# Altium PCB PCB.PcbDoc (part 1 of 2)
Units mil, origin at the board's own origin, x right, y up, seen from the top; angles counter-clockwise.
Board outline 3920 x 1470 mil, 2 copper layers (Top Layer, Bottom Layer), stack 60.433 mil thick; 97 components, 79 nets, 353 pads, 358 vias.
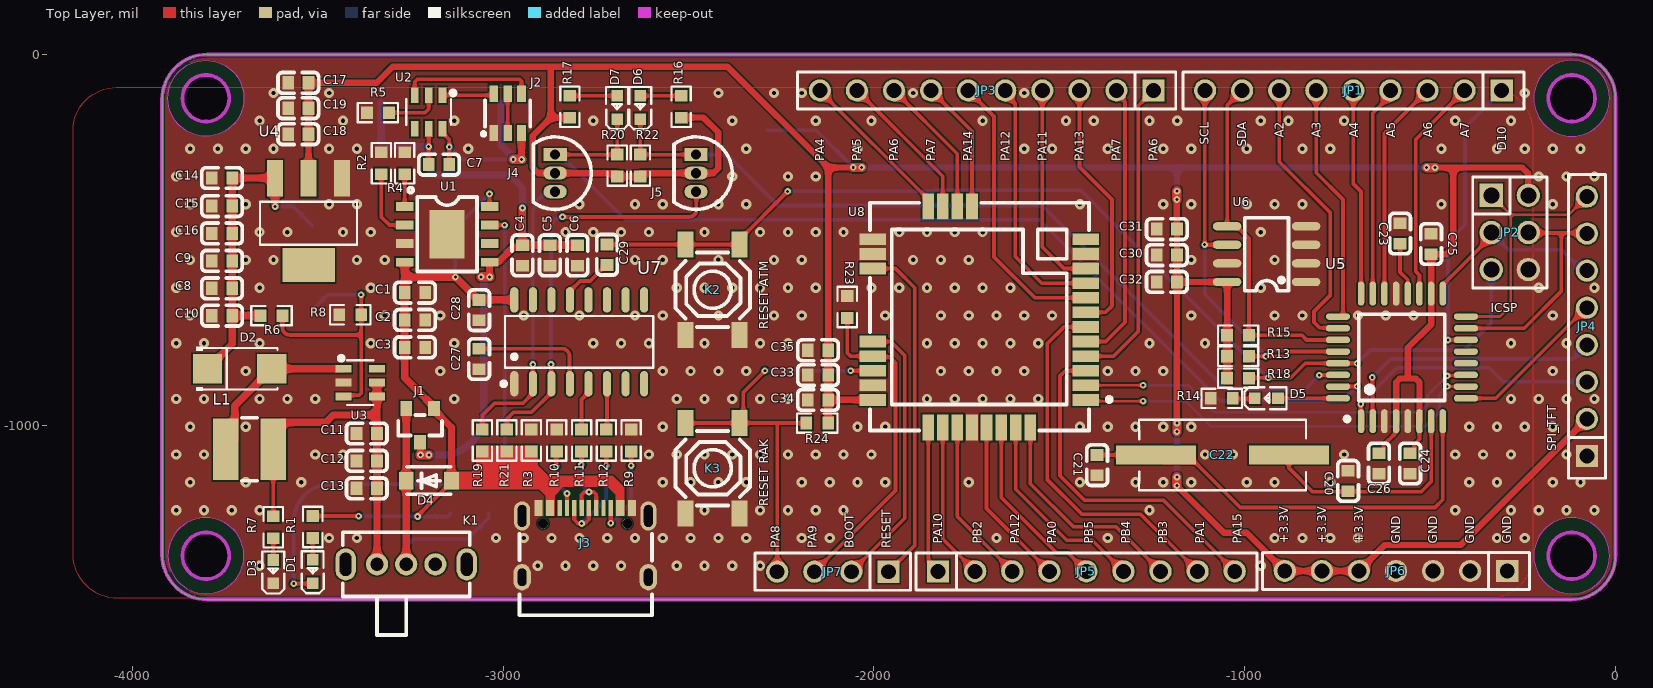
[diagram p0: Top Layer view]
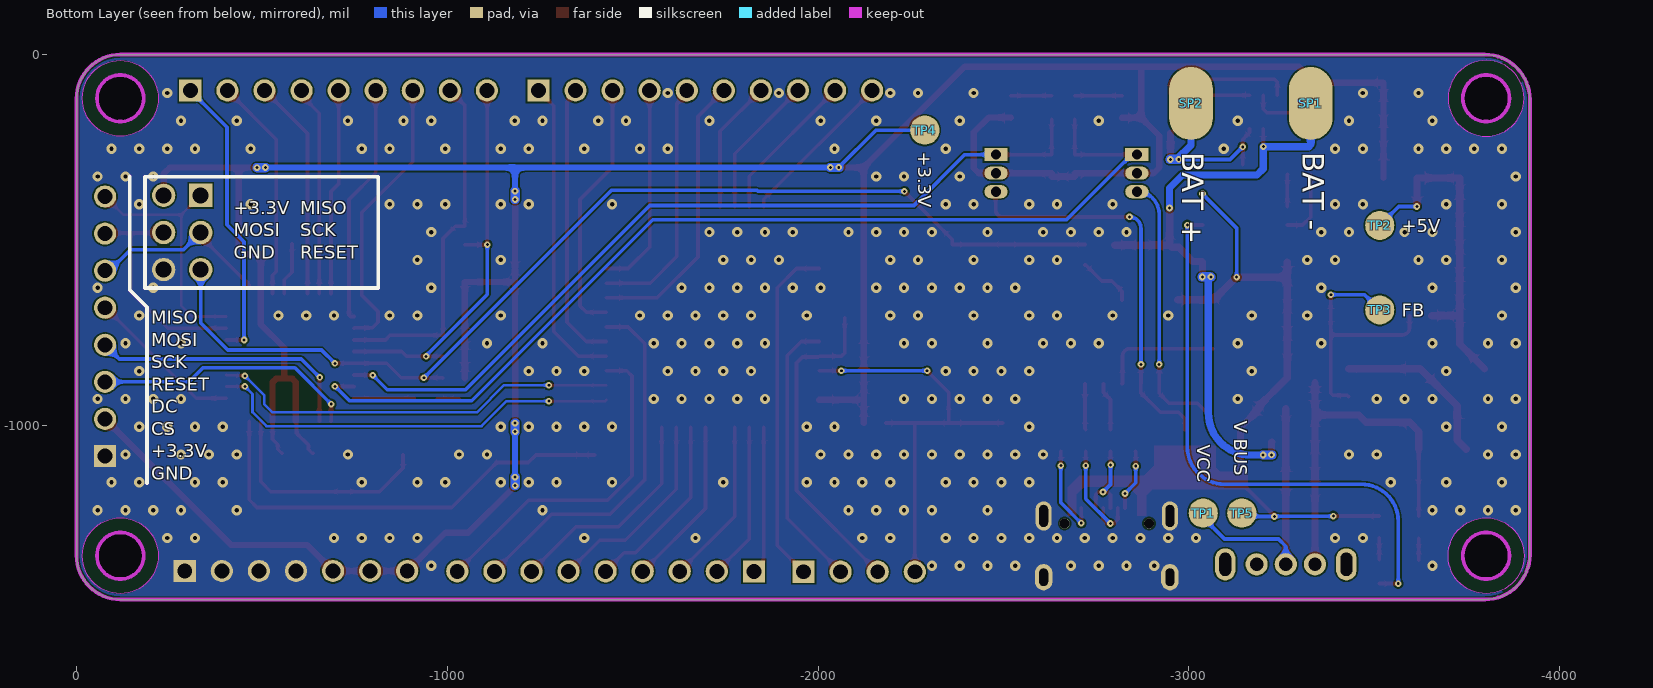
[diagram p1: Bottom Layer view, seen from below]
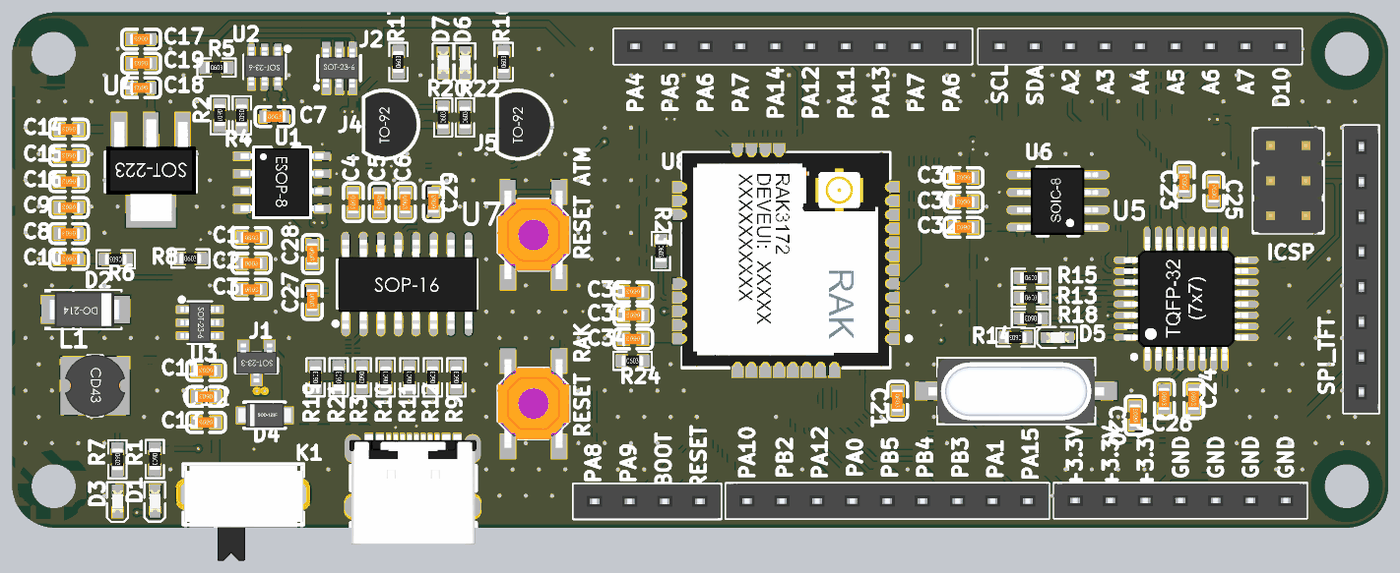
[diagram p3: 3D render of the assembled board from above, using the file's embedded part models]

## Layer stack, top to bottom
Top Solder: solder mask 0.5, Solder Resist, Dk 3.8
Top Layer: signal copper 1.378
Dielectric 1: prepreg 7.874, 7628, Dk 4.6
Core: core 41.929, FR-4, Dk 4.5
Dielectric 2: prepreg 7.874, 7628, Dk 4.6
Bottom Layer: signal copper 1.378
Bottom Solder: solder mask 0.5, Solder Resist, Dk 3.8

## Board outline
-3920,-1348.7 ccw(c-3798.7,-1348.7) -3798.7,-1470 -118.5,-1470 ccw(c-118.5,-1351.5) 0,-1351.5 0,-118.5 ccw(c-118.5,-118.5) -118.5,0 -3798.44,0 ccw(c-3798.44,-121.56) -3920,-121.56
cut-out: -181.1,-118.11 ccw(c-118.11,-118.11) -118.11,-181.1 ccw(c-118.11,-118.11) -55.12,-118.11 ccw(c-118.11,-118.11) -118.11,-55.12 ccw(c-118.11,-118.11)
cut-out: -3801.89,-181.1 cw(c-3801.89,-118.11) -3864.88,-118.11 cw(c-3801.89,-118.11) -3801.89,-55.12 cw(c-3801.89,-118.11) -3738.9,-118.11 cw(c-3801.89,-118.11)
cut-out: -3864.88,-1351.89 ccw(c-3801.89,-1351.89) -3801.89,-1414.88 ccw(c-3801.89,-1351.89) -3738.9,-1351.89 ccw(c-3801.89,-1351.89) -3801.89,-1288.9 ccw(c-3801.89,-1351.89)
cut-out: -181.1,-1351.89 ccw(c-118.11,-1351.89) -118.11,-1414.88 ccw(c-118.11,-1351.89) -55.12,-1351.89 ccw(c-118.11,-1351.89) -118.11,-1288.9 ccw(c-118.11,-1351.89)

## Design rules (kind name [scope] priority, off if disabled: settings)
BoardOutlineClearance [All] p1: gap=7.87 ignorepadtopadclearanceinfootprint=FALSE
Clearance Clearance_1 [InNet('No Net') vs InNet('No Net')] p1: gap=10 ignorepadtopadclearanceinfootprint=FALSE
Clearance [All] p2: gap=4 ignorepadtopadclearanceinfootprint=FALSE except(5: Arc-Via Track-Via SMDPad-Via THPad-Via Via-Via Via-Fill Via-Poly Via-Region)
ComponentClearance [All] p1: gap=4 collisioncheckmode=3 verticalgap=4 showdistances=TRUE
DiffPairsRouting [All] p1: maxlimit=4 minlimit=4 mostfreqgap=4 toplayer_minwidth=4 toplayer_maxwidth=71497.94 toplayer_prefwidth=4 bottomlayer_minwidth=4 bottomlayer_maxwidth=71497.94 bottomlayer_prefwidth=4 maxuncoupledlength=500
Height [All] p1: minheight=0 maxheight=71497.94 prefheight=500
HoleSize [All] p1: absolutevalues=TRUE maxlimit=248.03 minlimit=7.87 maxpercent=80.000 minpercent=20.000
HoleToHoleClearance [All] p1: gap=9.84 allowstackedmicrovias=FALSE
MinimumAnnularRing [All] p1: minimumring=3
MinimumSolderMaskSliver [All] p1: minsoldermaskwidth=0
PlaneClearance [All] p1: clearance=4
PlaneConnect PlaneConnectPowerPads [InPadClass('PowerPads')] p1: planeconnectstyle=Direct reliefexpansion=20 reliefentries=4 reliefconductorwidth=10 reliefairgap=10
PlaneConnect [All] p2: pad.planeconnectstyle=Relief pad.reliefexpansion=11.81 pad.reliefentries=4 pad.reliefconductorwidth=4 pad.reliefairgap=4 via.planeconnectstyle=Direct via.reliefexpansion=11.81 via.reliefentries=4 via.reliefconductorwidth=5 via.reliefairgap=5
PolygonConnect PolygonConnectPowerPads [All vs (InPadClass('PowerPads'))] p1: connectstyle=Direct reliefconductorwidth=10 reliefentries=4 polygonreliefangle="90 Angle" airgapwidth=10
PolygonConnect [All] p2: connectstyle=Direct reliefconductorwidth=4 reliefentries=4 polygonreliefangle="90 Angle" airgapwidth=4
RoutingVias [All] p1: holewidth=7.87 width=17.72 viastyle="Through Hole" minholewidth=7.87 minwidth=17.72 maxholewidth=248.03 maxwidth=257.87
SilkToSilkClearance [All] p1: silktosilkclearance=0
SilkToSolderMaskClearance [IsPad] p1: minsilkscreentomaskgap=4 clearancetoexposedcopper=TRUE
SolderMaskExpansion [All] p1: expansion=2.95 istentingtop=FALSE
Width [All] p1: maxlimit=71497.94 minlimit=4 preferedwidth=4
20 further rules are at their usual default settings.

## Classes and differential pairs
component class "Voltage Source": C1 C2 C3 C4 C5 C6 C7 C8 C9 C10 C11 C12 C13 C14 C15 C16 C17 C18 C19 D1 D2 D3 D4 J1 J2 J3 K1 L1 R1 R2 R3 R4 R5 R6 R7 R8 R9 R10 R11 R12 SP1 SP2 TP1 TP2 TP3 TP4 TP5 U1 U2 U3 U4
component class Peripheral: C27 C28 C29 C30 C31 C32 C33 C34 C35 J4 J5 K3 R19 R20 R21 R22 R23 R24 Reset_U4 U6 U7 U8
component class "Micro Controller": C20 C21 C22 C23 C24 C25 C26 D5 D6 D7 K2 R13 R14 R15 R16 R17 R18 Reset_U4 U5
component class Connector: JP1 JP2 JP3 JP4 JP5 JP6 JP7
differential pair D: +D_P -D_N

## Components (designator, comment, footprint, x,y, rotation, side; value= is the part's Value field where it differs from the comment)
C1 "100nF" C0603 -3238.19,-642.03 r0 top
C2 "10uF" C0603 -3238.19,-715.94 r0 top
C3 "22uF" C0603 -3238.19,-789.85 r0 top
C4 "100nF" C0603 -2948.12,-541.81 r270 top
C5 "10uF" C0603 -2874.21,-541.81 r270 top
C6 "22uF" C0603 -2800.07,-541.81 r270 top
C7 "100nF" C0603 -3173,-297 r0 top
C8 "100nF" C0603 -3758.31,-630.54 r180 top
C9 "10uF" C0603 -3758.31,-556.63 r180 top
C10 "22uF" C0603 -3758.31,-704.46 r180 top
C11 "100nF" C0603 -3367.87,-1022.15 r180 top
C12 "10uF" C0603 -3367.87,-1096.06 r180 top
C13 "22uF" C0603 -3367.87,-1169.97 r180 top
C14 "100nF" C0603 -3758.31,-333.07 r180 top
C15 "10uF" C0603 -3758.31,-408.76 r180 top
C16 "22uF" C0603 -3758.31,-482.67 r180 top
C17 "100nF" C0603 -3552.56,-76.27 r180 top
C18 "10uF" C0603 -3552.56,-214.94 r180 top
C19 "22uF" C0603 -3552.56,-144.94 r180 top
C20 "12pF" C0603 -721,-1150 r90 top
C21 "12pF" C0603 -1398,-1107.56 r270 top
C22 "X49SM16MSD2SC" X49SM16MSD2SC -1060,-1080 r0 top
C23 "100nF" C0603 -581,-483 r90 top
C24 "100nF" C0603 -554,-1103 r270 top
C25 "10uF" C0603 -497.26,-511 r90 top
C26 "22uF" C0603 -638,-1103 r270 top
C27 "100nF" C0603 -3065,-821 r270 top
C28 "100nF" C0603 -3065,-689.47 r270 top
C29 "100nF" C0603 -2720,-540 r90 top
C30 "100nF" C0603 -1210,-541 r180 top
C31 "10uF" C0603 -1210,-471 r180 top
C32 "22uF" C0603 -1210,-613.41 r180 top
C33 "100nF" C0603 -2150.81,-864.55 r180 top
C34 "10uF" C0603 -2151,-931.66 r180 top
C35 "22uF" C0603 -2151,-797.66 r180 top
D1 "RED" LED0603 -3513.54,-1394.46 r90 top
D2 "SS34" SS34 -3711,-847.6 r0 top
D3 "YELLOW" LED0603 -3620,-1395 r90 top
D4 "SOD4007" SOD4007 -3200.55,-1149.37 r0 top
D5 "YELLOW" LED0603 -941.73,-927.37 r0 top
D6 "YELLOW" LED0603 -2630.14,-142.82 r90 top
D7 "YELLOW" LED0603 -2692.55,-142.82 r90 top
J1 "AO3401A" AO3401A -3224.17,-1000 r90 top
J2 "FS8205A" FS8205A -2988,-159 r270 top
J3 "TYPE-C 16PIN 2MD(073)" TYPE_C_FAMALE -2778.78,-1316.37 r0 top
J4 "2N7000" 2N7000 -2860,-320 r270 top
J5 "2N7000" 2N7000 -2480,-320 r270 top
JP1 "JP 1x9 2.54" "JP 1x9 CT" -707,-97 r180 top
JP2 "Header" "JP 2x3 DT" -285,-480 r270 top
JP3 "Header" "JP 1x10 CT" -1245.91,-97.02 r180 top
JP4 "JP 1x8 2.54" "JP 1x8 CT" -77,-1083 r90 top
JP5 "JP 1x9 2.54" "JP 1x9 CT" -1427,-1394 r0 top
JP6 "JP 1x7 2.54" "JP 1x7 CT" -292,-1393 r180 top
JP7 "JP 1x4 2.54" "JP 1x4 CT" -1961,-1395 r180 top
K1 "SK12D07VG4" SK12D07VG4 -3261.58,-1375 r0 top
K2 "TS-1140SP-4x4x1.5-260" 4x4x1.5 -2435,-634.49 r90 top
K3 "TS-1140SP-4x4x1.5-260" 4x4x1.5 -2435,-1116.05 r90 top
L1 "10uH" CD43 -3684,-1065 r270 top
R1 "1kΩ" R0603 -3513.68,-1274.46 r270 top
R2 "2kΩ" R0603 -3328.8,-293.22 r270 top
R3 "10kΩ" R0603 -2924,-1041 r270 top
R4 "1kΩ" R0603 -3265.99,-293.43 r270 top
R5 "1kΩ" R0603 -3338,-157 r0 top
R6 "5k1" R0603 -3625,-704.46 r180 top
R7 "1kΩ" R0603 -3620.14,-1275 r270 top
R8 "680" R0603 -3412.66,-702 r0 top
R9 "5k1Ω" R0603 -2654.87,-1041.22 r90 top
R10 "5k1Ω" R0603 -2855.98,-1041.22 r90 top
R11 "0Ω" R0603 -2788.73,-1041.22 r90 top
R12 "0Ω" R0603 -2721.8,-1041.22 r90 top
R13 "4k7Ω" R0603 -1017.84,-813.78 r0 top
R14 "1kΩ" R0603 -1061.73,-927.24 r180 top
R15 "4k7Ω" R0603 -1017.84,-757.23 r0 top
R16 "1kΩ" R0603 -2520,-141 r90 top
R17 "1kΩ" R0603 -2820,-141 r90 top
R18 "10kΩ" R0603 -1017.84,-872.78 r180 top
R19 "10kΩ" R0603 -3056,-1041 r90 top
R20 "10kΩ" R0603 -2692.41,-299.66 r90 top
R21 "10kΩ" R0603 -2990,-1041 r90 top
R22 "10kΩ" R0603 -2630,-299.66 r90 top
R23 "10kΩ" R0603 -2072,-681 r270 top
R24 "10kΩ" R0603 -2153.1,-994 r0 top
SP1 "BAT+" SP -3329,-132 r0 top
SP2 "BAT-" SP -3006,-132 r180 top
TP1 "TP" TP -3039,-1237 r0 top
TP2 "TP" TP -3515,-461 r0 top
TP3 "TP" TP -3515,-689 r0 top
TP4 "TP" TP -2288,-204 r0 top
TP5 "TP" TP -3143,-1237 r0 top
U1 "TP4056" TP4056 -3151.25,-485 r270 top
U2 "DW01A" DW01A -3201,-155 r180 top
U3 "MT3608" MT3608 -3385.55,-885 r270 top
U4 "LM1117S-3.3" AMS1117-3.3 -3525,-451.07 r90 top
U5 "ATMEGA328-AU" ATMEGA328-AU -576,-817 r0 top
U6 "AT24C02C-SSHM-T" AT24C02C-SSHM-T -941,-538.41 r90 top
U7 "CH340C" CH340C -2795,-775 r0 top
U8 "RAK3172-9-SM-I" RAK3172-9-SM-I -1716,-708 r180 top

## Footprints (in the part's own frame and the unit in brackets; to place one, negate y for a bottom-side part, rotate by r counter-clockwise, add the part's x,y. Pads: shape width x height; smd on the part's side, far side on the other; paste and mask are expansions set on the pad)
2N7000 [mm]
  rect 0.9x1.6 hole 0.7 paste-2539.97 mask+0.051: 1(-1.27,0)
  oval 0.9x1.6 hole 0.7 paste-2539.97 mask+0.051: 2(0,0) 3(1.27,0)
  silkscreen extent -2.48,-1.5 2.48,2.48, body extent -2.3,-1.3 2.3,2.3, height 5.6
4x4x1.5 [mm]
  rect 1.8x1.1 smd paste+0 mask+0.051: 1(-3.1,1.85) 2(3.1,1.85) 3(-3.1,-1.85) 4(3.1,-1.85)
  silkscreen extent -2.55,-2.55 2.55,2.55, body extent -3.2,-2.6 3.2,2.6, height 1.5
AMS1117-3.3 [mm]
  rect 2.5x1.1 smd paste+0 mask+0.051: 1(2.97,-2.3) 2(2.97,0) 3(2.97,2.3)
  rect 2.34x3.6 smd paste+0 mask+0.051: 4(-2.97,0)
  silkscreen extent -1.57,-3.33 1.37,3.33, body extent -3.66,-3.28 3.71,3.22, height 1.82
AO3401A [mm]
  rect 1x0.8 smd paste+0 mask+0.051: 1(1.15,-0.95) 2(1.15,0.95) 3(-1.15,0)
  silkscreen extent -0.7,-1.5 0.7,1.5, body extent -1.4,-1.45 1.4,1.45, height 1.26
AT24C02C-SSHM-T [mil]
  oval 22.38x76.78 smd paste+0 mask+2: 1(-75,-106.5) 2(-25,-106.5) 3(25,-106.5) 4(75,-106.5) 5(75,106.5) 6(25,106.5) 7(-25,106.5) 8(-75,106.5)
  silkscreen extent -98,-59 98,59, body extent -96,-115 96,117, height 60
ATMEGA328-AU [mm]
  oval 0.45x1.65 smd paste+0 mask+0.051: 1(-2.8,-4.369) 2(-2,-4.369) 3(-1.2,-4.369) 4(-0.4,-4.369) 5(0.4,-4.369) 6(1.2,-4.369) 7(2,-4.369) 8(2.8,-4.369) 17(2.8,4.369) 18(2,4.369) 19(1.2,4.369) 20(0.4,4.369) 21(-0.4,4.369) 22(-1.2,4.369) 23(-2,4.369) 24(-2.8,4.369)
  oval 1.65x0.45 smd paste+0 mask+0.051: 9(4.382,-2.8) 10(4.382,-2) 11(4.382,-1.2) 12(4.382,-0.4) 13(4.382,0.4) 14(4.382,1.2) 15(4.382,2) 16(4.382,2.8) 25(-4.381,2.8) 26(-4.381,2) 27(-4.381,1.2) 28(-4.381,0.4) 29(-4.381,-0.4) 30(-4.381,-1.2) 31(-4.381,-2) 32(-4.381,-2.8)
  silkscreen extent -3.91,-4.36 2.94,2.95, body extent -4.5,-4.5 4.5,4.5, height 1.12
C0603 [mm]
  rect 0.8x0.9 smd: 1(-0.7,0) 2(0.7,0)
  silkscreen extent -1.39,-0.71 1.39,0.71, body extent -0.8,-0.4 0.8,0.4, height 0.4
CD43 [mm]
  rect 4.2x1.75 smd paste+0 mask+0.051: 1(0,1.625) 2(0,-1.625)
  silkscreen extent -2.16,-0.52 2.16,0.52, body extent -2.25,-2.19 2.25,2.19, height 3.21
CH340C [mm]
  oval 0.56x1.745 smd paste+0 mask+0.051: 1(-4.445,-2.873) 2(-3.175,-2.873) 3(-1.905,-2.873) 4(-0.635,-2.873) 5(0.635,-2.873) 6(1.905,-2.873) 7(3.175,-2.873) 8(4.445,-2.873) 9(4.445,2.873) 10(3.175,2.873) 11(1.905,2.873) 12(0.635,2.873) 13(-0.635,2.873) 14(-1.905,2.873) 15(-3.175,2.873) 16(-4.445,2.873)
  silkscreen extent -5.33,-3.02 5.08,1.77, body extent -4.95,-3.26 5.05,3.2, height 1.92
DW01A [mm]
  rect 0.532x1.072 smd paste+0 mask+0.051: 1(-0.95,-1.149) 2(0,-1.149) 3(0.95,-1.149) 4(0.95,1.149) 5(0,1.149) 6(-0.95,1.149)
  silkscreen extent -1.82,-1.45 1.54,0.89, body extent -1.45,-1.43 1.45,1.37, height 1.46
FS8205A [mm]
  rect 1.1x0.6 smd paste+0 mask+0.051: 1(1.35,-0.95) 2(1.35,0) 3(1.35,0.95) 4(-1.35,0.95) 5(-1.35,0) 6(-1.35,-0.95)
  silkscreen extent -0.9,-1.78 1.52,1.55, body extent -1.4,-1.48 1.4,1.42, height 1.46
"JP 1x4 CT" [mm]
  rect 1.52x1.52 hole 1.02: 1(0,0)
  round 1.52 hole 1.02: 2(2.54,0) 3(5.08,0) 4(7.62,0)
  silkscreen extent -1.52,-1.27 9.14,1.27, body extent -1.52,-1.25 9.14,1.25, height 8.51
"JP 1x7 CT" [mm] "7 row, straight, gold plating"
  rect 1.52x1.52 hole 1.02: 1(0,0)
  round 1.52 hole 1.02: 2(2.54,0) 3(5.08,0) 4(7.62,0) 5(10.16,0) 6(12.7,0) 7(15.24,0)
  silkscreen extent -1.52,-1.27 16.76,1.27, body extent -1.52,-1.25 16.76,1.25, height 8.51
"JP 1x8 CT" [mm] "8 row, straight, gold plating"
  rect 1.52x1.52 hole 1.02: 1(0,0)
  round 1.52 hole 1.02: 2(2.54,0) 3(5.08,0) 4(7.62,0) 5(10.16,0) 6(12.7,0) 7(15.24,0) 8(17.78,0)
  silkscreen extent -1.52,-1.27 19.3,1.27, body extent -1.52,-1.25 19.3,1.25, height 8.51
"JP 1x9 CT" [mm] "9 row, straight, gold plating"
  rect 1.52x1.52 hole 1.02: 1(-10.16,0)
  round 1.52 hole 1.02: 2(-7.62,0) 3(-5.08,0) 4(-2.54,0) 5(0,0) 6(2.54,0) 7(5.08,0) 8(7.62,0) 9(10.16,0)
  silkscreen extent -11.68,-1.27 11.68,1.27, body extent -11.68,-1.25 11.68,1.25, height 8.51
"JP 1x10 CT" [mm] "10 row, straight, gold plating"
  rect 1.52x1.52 hole 1.02: 1(0,0)
  round 1.52 hole 1.02: 2(2.54,0) 3(5.08,0) 4(7.62,0) 5(10.16,0) 6(12.7,0) 7(15.24,0) 8(17.78,0) 9(20.32,0) 10(22.86,0)
  silkscreen extent -1.52,-1.27 24.38,1.27, body extent -1.52,-1.25 24.38,1.25, height 8.51
"JP 2x3 DT" [mm]
  rect 1.6x1.6 hole 1.1: 1(-2.54,-1.27)
  round 1.6 hole 1.1: 2(0,-1.27) 3(2.54,-1.27) 4(2.54,1.27) 5(0,1.27) 6(-2.54,1.27)
  silkscreen extent -3.81,-2.54 3.81,2.54, body extent -3.81,-2.54 3.81,2.54, height 8.55
LED0603 [mm]
  rect 0.8x0.8 smd paste+0 mask+0.051: 1(-0.799,-0.004) 2(0.799,0.004)
  silkscreen extent -1.49,-0.75 1.39,0.76, body extent -0.8,-0.42 0.8,0.38, height 0.7
MT3608 [mm]
  rect 0.532x1.072 smd paste+0 mask+0.051: 1(-0.95,-1.149) 2(0,-1.149) 3(0.95,-1.149) 4(0.95,1.149) 5(0,1.149) 6(-0.95,1.149)
  silkscreen extent -1.82,-1.45 1.54,0.89, body extent -1.45,-1.4 1.45,1.4, height 1.46
R0603 [mil]
  rect 31.75x34.02 smd paste-3937.01 mask+2: 1(-29.66,0) 2(29.66,0)
  silkscreen extent -55,-26 55,26, body extent -31,-16 31,16, height 18
RAK3172-9-SM-I [mm]
  rect 1.8x0.8 smd paste+0 mask+0.051: 1(-7.287,5.68) 2(-7.287,4.68) 3(-7.287,3.68) 4(-7.287,2.68) 5(-7.287,1.68) 6(-7.287,0.68) 7(-7.287,-0.32) 8(-7.287,-1.32) 9(-7.287,-2.32) 10(-7.287,-3.32) 11(-7.287,-4.32) 12(-7.287,-5.32) 17(7.287,-5.32) 18(7.287,-4.32) 19(7.287,-3.32) 20(7.287,1.68) 21(7.287,2.68) 22(7.287,3.68) 23(7.287,4.68) 24(7.287,5.68)
  rect 0.8x1.8 smd paste+0 mask+0.051: 13(0.5,-7.569) 14(1.5,-7.569) 15(2.5,-7.569) 16(3.5,-7.569) 25(3.5,7.569) 26(2.5,7.569) 27(1.5,7.569) 28(0.5,7.569) 29(-0.5,7.569) 30(-1.5,7.569) 31(-2.5,7.569) 32(-3.5,7.569)
  silkscreen extent -9.05,-7.82 7.49,7.78, body extent -7.5,-7.82 7.49,7.67, height 3.51
SK12D07VG4 [mil]
  round 60 hole 36 paste-99999 mask+1.97: 1(-78.74,0) 2(0,0) 3(78.74,0)
  oval 55.12x86.61 hole 31.5 slot 62.99 at 90 deg paste-99999 mask+1.97: 4(163.39,0) 5(-163.39,0)
  silkscreen extent -171,-191 171,87, body extent -169,-190 170,83, height 188
SOD4007 [mm]
  rect 1x1.2 smd paste+0 mask+0.051: 1(-1.55,0) 2(1.55,0)
  silkscreen extent -1.52,-0.93 1.49,0.95, body extent -1.9,-0.9 1.9,0.9, height 1.02
SP [mm]
  oval 3x5 smd far side paste+0 mask+0.051: 1(0,0)
SS34 [mm]
  rect 2x2 smd paste+0 mask+0.051: 1(-2.2,0) 2(2.2,0)
  silkscreen extent -2.98,-1.5 2.6,1.5, body extent -2.65,-1.29 2.49,1.27, height 2.63
TP [mm]
  round 2 smd far side paste+0 mask+0.051: 1(0,0)
TP4056 [mm]
  rect 0.6x1.2 smd paste+0 mask+0.051: 1(-1.905,-2.908) 2(-0.635,-2.908) 3(0.635,-2.908) 4(1.905,-2.908) 5(1.905,2.908) 6(0.635,2.908) 7(-0.635,2.908) 8(-1.905,2.908)
  rect 3.3x2.4 smd paste+0 mask+0.051: 9(0,0)
  silkscreen extent -3.2,-2.67 2.55,2.05, body extent -2.46,-3 2.44,3, height 1.76
TYPE_C_FAMALE [mm]
  rect 0.55x1.1 smd paste-100 mask+0.05: 1(-3.2,2.375) 2(-2.4,2.375) 11(2.4,2.375) 12(3.2,2.375)
  rect 0.3x1.1 smd paste-100 mask+0.05: 3(-1.75,2.375) 4(-1.25,2.375) 5(-0.75,2.375) 6(-0.25,2.375) 7(0.25,2.375) 8(0.75,2.375) 9(1.25,2.375) 10(1.75,2.375)
  oval 1.2x1.8 hole 0.6 slot 1.2 at 90 deg paste-2539.97 mask+0.05: 13(-4.325,-2.375) 14(4.325,-2.375)
  oval 1.1x2 hole 0.6 slot 1.5 at 90 deg paste-2539.97 mask+0.05: 13(-4.325,1.825) 14(4.325,1.825)
  round 0.7 hole 0.7 unplated paste-2539.97: ""(-2.89,1.305) ""(2.89,1.305)
  silkscreen extent -4.5,-4.97 4.57,0.6, body extent -4.57,-5.09 4.63,2.86, height 3.21
X49SM16MSD2SC [mm]
  rect 5.5x1.3 smd paste+0 mask+0.051: 1(-4.553,0) 2(4.553,0)
  silkscreen extent -5.71,-2.41 5.72,2.41, body extent -6.35,-2.38 6.35,2.32, height 4.2

## Part data
C1 C4 C7 C8 C11 C14 C17 C23 C24 C27 C28 C29 C30 C33: library part C0603_100nF_±1%, "50V 10pF NP0 ±1% 0402 Multilayer Ceramic Capacitors MLCC - SMD/SMT ROHS", LCSC Part #=C513681, Manufacturer=YAGEO, Mfr. Part #=CC0402FRNPO9BN100, Package=0603, Tolerance=±1%, Voltage Rating=50V, Capacitance=100nF, Link=https://www.lcsc.com/product-detail/C513681.html?s_z=n_capital%2520yageo%252010pF%25200402
C2 C5 C9 C12 C15 C18 C25 C31 C34: library part C0603_10uF_±1%, "50V 10pF NP0 ±1% 0402 Multilayer Ceramic Capacitors MLCC - SMD/SMT ROHS", LCSC Part #=C513681, Manufacturer=YAGEO, Mfr. Part #=CC0402FRNPO9BN100, Package=0603, Tolerance=±1%, Voltage Rating=50V, Capacitance=10uF, Link=https://www.lcsc.com/product-detail/C513681.html?s_z=n_capital%2520yageo%252010pF%25200402
C3 C6 C10 C13 C16 C19 C26 C32 C35: library part C0603_22uF_±1%, "50V 10pF NP0 ±1% 0402 Multilayer Ceramic Capacitors MLCC - SMD/SMT ROHS", LCSC Part #=C513681, Manufacturer=YAGEO, Mfr. Part #=CC0402FRNPO9BN100, Package=0603, Tolerance=±1%, Voltage Rating=50V, Capacitance=22uF, Link=https://www.lcsc.com/product-detail/C513681.html?s_z=n_capital%2520yageo%252010pF%25200402
C20 C21: library part C0603_12pF_±1%, "50V 10pF NP0 ±1% 0402 Multilayer Ceramic Capacitors MLCC - SMD/SMT ROHS", LCSC Part #=C513681, Manufacturer=YAGEO, Mfr. Part #=CC0402FRNPO9BN100, Package=0603, Tolerance=±1%, Voltage Rating=50V, Capacitance=12pF, Link=https://www.lcsc.com/product-detail/C513681.html?s_z=n_capital%2520yageo%252010pF%25200402
C22: "16MHz Crystal Oscillator 20pF ±20ppm ±30ppm HC-49S-SMD Crystals ROHS", LCSC Part #=C12676, Load Capacitance=20pF, Manufacturer="YXC Crystal Oscillators", Package=HC-49S-SMD, Link=https://www.lcsc.com/product-detail/C12676.html?s_z=n_Crystal%2520Oscillators%2520X49%252016Mhz, Mfr. Part #=X49SM16MSD2SC
D1: library part D0603_RED, "25mcd~40mcd Water Clear -40℃~+85℃ 624nm Red 120° 60mW 0402 LED Indication - Discrete ROHS", LCSC Part #=C965793, Manufacturer=XINGLIGHT, Mfr. Part #=XL-1005UGC, Package=0603, Power(Watts)=60mW, Voltage - Forward(Vf)=3V, Illumination Color=RED, Link=https://www.lcsc.com/product-detail/C136765.html?s_z=n_LED%25200402%2520RED
D2: "40V Independent 3A 550mV@3A SMA(DO-214AC) Schottky Diodes ROHS", Current - Rectified=3A, LCSC Part #=C8678, Manufacturer="MDD(Microdiode Semiconductor)", Package=SMA(DO-214AC), Voltage - DC Reverse(Vr)=40V, Link=https://www.lcsc.com/product-detail/C8678.html?s_z=n_SS34, Mfr. Part #=SS34
D3 D5 D6 D7: library part D0603_YELLOW, "25mcd~40mcd Water Clear -40℃~+85℃ 624nm Red 120° 60mW 0402 LED Indication - Discrete ROHS", LCSC Part #=C965793, Manufacturer=XINGLIGHT, Mfr. Part #=XL-1005UGC, Package=0603, Power(Watts)=60mW, Voltage - Forward(Vf)=3V, Illumination Color=YELLOW, Link=https://www.lcsc.com/product-detail/C136765.html?s_z=n_LED%25200402%2520RED
D4: "1A Independent 1kV 1.1V@1A SOD-123FL Diodes - General Purpose ROHS", Current - Rectified=1A, LCSC Part #=C18124, Manufacturer="MDD(Microdiode Semiconductor)", Package=SOD-123FL, Voltage - DC Reverse(Vr)=1kV, Link=https://www.lcsc.com/product-detail/C18124.html?s_z=n_SOD4007, Mfr. Part #=SOD4007
J1: library part AO3401, "30V 4A 900mV@250uA 1 P-Channel SOT-23 MOSFETs ROHS", Current - Continuous Drain(Id)=4A, Drain to Source Voltage=30V, LCSC Part #=C15127, Manufacturer=AOS, Package=SOT-23, Link=https://www.lcsc.com/product-detail/C15127.html?s_z=n_AO3401, Mfr. Part #=AO3401A
J2: "20V 9A 31.5mΩ@2.5V 1.5W 1.2V@250uA SOT-23-6 MOSFETs ROHS", Current - Continuous Drain(Id)=9A, Drain to Source Voltage=20V, LCSC Part #=C2830320, Manufacturer="TECH PUBLIC", Package=SOT-23-6, Link=https://www.lcsc.com/product-detail/C2830320.html?s_z=n_fs8205a, Mfr. Part #=FS8205A
J3: library part TYPE_C_FAMALE_16PIN, "3A 1 Surface Mount, Right Angle 16P Female -25℃~+85℃ Type-C SMD USB Connectors ROHS", LCSC Part #=C2765186, Manufacturer="SHOU HAN", Package=SMD, Link=https://www.lcsc.com/product-detail/C2765186.html?s_z=n_type%2520c, Mfr. Part #="TYPE-C 16PIN 2MD(073)", Number of Contacts=16P
J4 J5: "60V 200mA 400mW 5Ω@10V 3V@1mA 1 N-Channel TO-92-3L MOSFETs ROHS", Current - Continuous Drain(Id)=200mA, Drain to Source Voltage=60V, Gate Threshold Voltage (Vgs(th))=3V@1mA, LCSC Part #=C232838, Manufacturer=onsemi, Package=TO-92-3L, Link=https://www.lcsc.com/product-detail/C232838.html?s_z=n_2n7000, Mfr. Part #=2N7000, RDS(on)=5Ω@10V, type=N-Channel
JP1 JP5: library part "JP 1x9 2.54 Cai Thang", "Cắm", Chung_Loai=Cắm, Don_Vi=Con, Ma_Hang=MH004006, Ten_Linh_Kien="Jump Đơn Cái 2.54MM 1x20P Thẳng"
JP2: library part "JP 2x3 2.54 Duc Thang", "Cắm", Chung_Loai=Cắm, Don_Vi=Con, Ma_Hang=MH002686, Ten_Linh_Kien="Jump Đôi Đực 2.54MM 2x40P Thẳng 11MM"
JP3: library part "JP 1x10 2.54 Cai Thang", "Cắm", Chung_Loai=Cắm, Don_Vi=Con, Ma_Hang=MH004006, Ten_Linh_Kien="Jump Đơn Cái 2.54MM 1x20P Thẳng"
JP4: library part "JP 1x8 2.54 Cai Thang", "Cắm", Chung_Loai=Cắm, Don_Vi=Con, Ma_Hang=MH004006, Ten_Linh_Kien="Jump Đơn Cái 2.54MM 1x20P Thẳng"
JP6: library part "JP 1x7 2.54 Cai Thang", "Cắm", Chung_Loai=Cắm, Don_Vi=Con, Ma_Hang=MH004006, Ten_Linh_Kien="Jump Đơn Cái 2.54MM 1x20P Thẳng"
JP7: library part "JP 1x4 2.54 Cai Thang", "Cắm", Chung_Loai=Cắm, Don_Vi=Con, Ma_Hang=MH004006, Ten_Linh_Kien="Jump Đơn Cái 2.54MM 1x20P Thẳng"
K1: "500mA SPDT 50V 5,000 Cycles Through Hole Slide Switches ROHS", LCSC Part #=C393937, Manufacturer="SHOU HAN", Package="Through Hole", Link=https://www.lcsc.com/product-detail/C393937.html?s_z=n_SK12D07VG4, Mfr. Part #=SK12D07VG4, Switch Height=8.8mm
K2 K3: "SMD Tactile Switches ROHS", LCSC Part #=C49023394, Manufacturer=CAX, Package=SMD, Link=https://www.lcsc.com/product-detail/C49023394.html?s_z=n_button%25204x4, Mfr. Part #=TS-1140SP-4x4x1.5-260
L1: library part CD4-10UH, "1.15A 10uH Unshielded Inductor ±20% SMD,4x4.5mm Power Inductors ROHS", Current Rating=1.15A, DC Resistance(DCR)=182mΩ, LCSC Part #=C18734467, Manufacturer=ZE, Mfr. Part #=CD43-100M, Package=SMD,4x4.5mm, Tolerance=±20%, Inductance=10uH, Key Attributes="FIXED IND 10uH 1.15A 182mΩ SMD,4x4.5mm", Link=https://www.lcsc.com/product-detail/C18734467.html?s_z=n_CD43%252010uH
R1 R4 R5 R7 R14 R16 R17: library part R0603_1kΩ_±1%, "62.5mW Thick Film Resistor 50V ±1% ±200ppm/℃ 10Ω 0402 Chip Resistor - Surface Mount ROHS", LCSC Part #=C138066, Manufacturer=YAGEO, Mfr. Part #=RC0402FR-0710RL, Package=0603, Tolerance=±1%, Link=https://www.lcsc.com/product-detail/C138066.html?s_z=n_resistor%25200402%252010R, Resistance=1kΩ
R2: library part R0603_2kΩ_±1%, "62.5mW Thick Film Resistor 50V ±1% ±200ppm/℃ 10Ω 0402 Chip Resistor - Surface Mount ROHS", LCSC Part #=C138066, Manufacturer=YAGEO, Mfr. Part #=RC0402FR-0710RL, Package=0603, Tolerance=±1%, Link=https://www.lcsc.com/product-detail/C138066.html?s_z=n_resistor%25200402%252010R, Resistance=2kΩ
R3 R18 R19 R20 R21 R22 R23 R24: library part R0603_10kΩ_±1%, "62.5mW Thick Film Resistor 50V ±1% ±200ppm/℃ 10Ω 0402 Chip Resistor - Surface Mount ROHS", LCSC Part #=C138066, Manufacturer=YAGEO, Mfr. Part #=RC0402FR-0710RL, Package=0603, Tolerance=±1%, Link=https://www.lcsc.com/product-detail/C138066.html?s_z=n_resistor%25200402%252010R, Resistance=10kΩ
R6: library part R0603_10kΩ_±1%, "62.5mW Thick Film Resistor 50V ±1% ±200ppm/℃ 10Ω 0402 Chip Resistor - Surface Mount ROHS", LCSC Part #=C138066, Manufacturer=YAGEO, Mfr. Part #=RC0402FR-0710RL, Package=0603, Resistance=10kΩ, Tolerance=±1%, Link=https://www.lcsc.com/product-detail/C138066.html?s_z=n_resistor%25200402%252010R
R8: library part R0603_2kΩ_±1%, "62.5mW Thick Film Resistor 50V ±1% ±200ppm/℃ 10Ω 0402 Chip Resistor - Surface Mount ROHS", LCSC Part #=C138066, Manufacturer=YAGEO, Mfr. Part #=RC0402FR-0710RL, Package=0603, Resistance=2kΩ, Tolerance=±1%, Link=https://www.lcsc.com/product-detail/C138066.html?s_z=n_resistor%25200402%252010R
R9 R10: library part R0603_5k1Ω_±1%, "100mW Thick Film Resistor 75V ±100ppm/℃ ±1% 5.1kΩ 0603 Chip Resistor - Surface Mount ROHS", LCSC Part #=C2907044, Manufacturer=FOJAN, Mfr. Part #=FRC0603F5101TS, Package=0603, Tolerance=±1%, Key Attributes="RES 5.1kΩ ±1% 100mW 0603", Link=https://www.lcsc.com/product-detail/C2907044.html?s_z=n_5k1%25200603, Resistance=5k1Ω
R11 R12: library part R0603_0Ω_±5%, "100mW Thick Film Resistor 75V ±5% 0Ω 0603 Chip Resistor - Surface Mount ROHS", LCSC Part #=C95177, Manufacturer=YAGEO, Mfr. Part #=RC0603JR-070RL, Package=0603, Tolerance=±5%, Key Attributes="RES 0Ω ±5% 100mW 0603", Link=https://www.lcsc.com/product-detail/C138066.html?s_z=n_resistor%25200402%252010R, Resistance=0Ω
R13 R15: library part R0603_4k7Ω_±1%, "62.5mW Thick Film Resistor 50V ±1% ±200ppm/℃ 10Ω 0402 Chip Resistor - Surface Mount ROHS", LCSC Part #=C138066, Manufacturer=YAGEO, Mfr. Part #=RC0402FR-0710RL, Package=0603, Tolerance=±1%, Link=https://www.lcsc.com/product-detail/C138066.html?s_z=n_resistor%25200402%252010R, Resistance=4k7Ω
SP1 SP2: library part SP
U1: "4V~6V Lithium-ion/Polymer 1 ESOP-8 Battery Management ROHS", Charging Saturation Voltage=4.2V, LCSC Part #=C382139, Manufacturer=TPOWER, Package=ESOP-8, Voltage - Supply=4V~6V, Key Attributes="1A Lithium Battery Charger", Link=https://www.lcsc.com/product-detail/C382139.html?s_z=n_TP4056, Mfr. Part #=TP4056, Number of Cells=1
U2: "1.5V~8V Lithium-ion/Polymer 1 SOT-23-6 Battery Management ROHS", Charging Saturation Voltage=4.3V, LCSC Part #=C2927799, Manufacturer=YONGYUTAI, Package=SOT-23-6, Voltage - Supply=1.5V~8V, Key Attributes="Lithium battery protection circuit", Link=https://www.lcsc.com/product-detail/C2927799.html?s_z=n_DW-01A, Mfr. Part #=DW01A
U3: "Boost Adjustable 2A 2V~24V SOT-23-6 DC-DC Converters ROHS", Frequency - Switching=1.2MHz, LCSC Part #=C84817, Manufacturer="XI'AN Aerosemi Tech", Package=SOT-23-6, Function=Boost, Link=https://www.lcsc.com/product-detail/C84817.html?s_z=n_mt3608, Mfr. Part #=MT3608
U4: "75dB@(120Hz) 1A Fixed 3.3V Positive 12V SOT-223-3 Voltage Regulators - Linear, Low Drop Out (LDO) Regulators ROHS", LCSC Part #=C126027, Manufacturer=HTC, Output Current=1A, Package=SOT-223-3, Voltage - Supply=12V, Link=https://www.lcsc.com/product-detail/C126027.html?s_z=n_lm1117-33, Mfr. Part #=LM1117S-3.3, Noise=100uV
U5: "AVR 20MHz TQFP-32(7x7) Microcontrollers (MCU/MPU/SOC) ROHS", LCSC Part #=C618731, Manufacturer=MICROCHIP, Package=TQFP-32(7x7), Voltage - Supply=1.8V~5.5V, ADC (Bit)=10bit, CPU Core=AVR, CPU Maximum Speed=20MHz, Link=https://www.lcsc.com/product-detail/C618731.html?s_z=n_C618731, Mfr. Part #=ATMEGA328-AU, Number of I/O=23, Program Storage Size=32KB
U6: "2Kbit 1MHz I2C SOIC-8 EEPROM ROHS", LCSC Part #=C6203, Manufacturer=MICROCHIP, Package=SOIC-8, Voltage - Supply=1.7V~5.5V, Interface=I2C, Key Attributes="I²C-Compatible (2-wire) Serial EEPROM", Link=https://www.lcsc.com/product-detail/C6203.html?s_z=n_24C02, Memory Size=2Kbit, Mfr. Part #=AT24C02C-SSHM-T, Write Cycle Endurance="1,000,000 Cycles"
U7: "2Mbps Transceiver USB 2.0 SOP-16 USB Converters ROHS", LCSC Part #=C84681, Manufacturer=WCH, Package=SOP-16, Voltage - Supply=3.3V;5V, Link=https://www.lcsc.com/product-detail/C84681.html?s_z=n_CH340C, Mfr. Part #=CH340C
U8: "15km SMD,15.5x15mm LoRa Modules ROHS", LCSC Part #=C19723905, Manufacturer=RAKwireless, Package=SMD,15.5x15mm, Voltage - Supply=2V~3.6V, Antenna Type="IPEX Connector", Interface Type=UART;SPI;I2C, Key Attributes="WisDuo LPWAN Module", Link=https://www.lcsc.com/product-detail/C19723905.html?s_z=n_RAK3172, Mfr. Part #=RAK3172-9-SM-I

## Via types
v1: diameter 27.56, hole 11.81, Top Layer to Bottom Layer, tented both sides, 304 vias
v2: diameter 17.72, hole 7.87, Top Layer to Bottom Layer, tented both sides, 52 vias
v3: diameter 17.72, hole 7.87, Top Layer to Bottom Layer, 2 vias

## Nets (pads, with @x,y where several pads share a name; then routed paths per layer and width w, separated by ;. In a path a pad name is that pad's centre, name@x,y a point inside that pad or via, vN(x,y) a via of type N, cw(c..) or ccw(c..) an arc to the next point about the centre after c; other vN are vias at no path point)
+3.3: C17.1 C18.1 C19.1 C24.1 C25.1 C26.1 C30.1 C31.1 C32.1 C33.1 C34.1 C35.1 J4.2 J5.2 JP2.6 JP4.2 JP6.5 JP6.6 JP6.7 R13.1 R15.1 R16.1 R17.1 R18.2 R20.1 R22.1 R24.2 TP4.1 U4.2 U5.4 U5.6 U5.18 U6.8 U8.24 | length 9648.9
  Top Layer w10: C26.1@-638,-1075.44 -636.13,-1075.44 -625.38,-1064.69 -625.38,-1053.38 -593.22,-1021.22 -593.22,-990.48 U5.4@-591.75,-989 ; C24.1@-554,-1075.44 -553.63,-1075.44 -542.88,-1064.69 -542.88,-1051.88 -528.76,-1037.76 U5.6@-528.76,-989
  Top Layer w17: U4.2@-3525,-333.07 C18.1@-3525,-214.94 C19.1@-3525,-144.94 C17.1@-3525,-76.27 -3341.27,-76.27 -3298,-33 -2868,-33 ; R17.1@-2820,-170.66 -2871.66,-170.66 ; R20.1@-2692.41,-329.32 R22.1@-2630,-329.32 ; R20.1@-2692.41,-320 J4.2@-2860,-320 -2905,-320 -2920,-305 -2920,-219 -2871.66,-170.66 ; R22.1@-2630,-320 J5.2@-2480,-320 -2433,-320 -2420,-307 -2420,-210 -2460,-170 -2519.34,-170 R16.1@-2520,-170.66 ; R24.2@-2123.44,-994 C34.1@-2123.44,-931.66 C35.1@-2123.44,-797.66 -2123.44,-304.56 ; C34.1@-2110.36,-931.55 -2002.99,-931.55 U8.24@-2002.91,-931.63 ; v2@-2056,-304.56 -2123.44,-304.56 ; v2(-2055.85,-304.34) -2055.66,-304.34 -2055.5,-304.5 -2033.26,-304.5 v2(-2033.12,-304.64) ; v2(-1183.05,-1016.95) -1183.05,-1016.76 -1182.9,-1016.6 -1182.9,-994.37 v2(-1182.76,-994.23) ; v2@-1183,-999.5 C32.1@-1182.44,-613.41 ; C31.1@-1183,-470.44 v2(-1183,-391) -1182.86,-390.86 -1182.86,-368.62 -1182.71,-368.47 v2(-1182.71,-368.28) ; v2(-1182.74,-1140.05) -1182.74,-1140.24 -1182.9,-1140.4 -1182.9,-1162.63 v2(-1183.03,-1162.77) -1055.8,-1290 -995,-1290 JP6.7@-892,-1393 JP6.6@-792,-1393 JP6.5@-692,-1393 -622.03,-1323.03 -417.03,-1323.03 JP4.2@-77,-983 ; C31.1@-1182.44,-471 C30.1@-1182.44,-541 C32.1@-1182.44,-613.41 ; R18.2@-1047.5,-872.78 R13.1@-1047.5,-813.78 R15.1@-1047.5,-757.23 U6.8@-1047.5,-613.41 C32.1@-1182.44,-613.41 ; U5.4@-591.75,-989 -591.61,-988.86 -591.61,-883.96 -581.65,-874 -560.11,-874 ; U5.6@-528.76,-989 -528.62,-988.86 -528.62,-883.96 -538.58,-874 -560.11,-874 ; v2(-509.54,-304.84) -509.35,-304.84 -509.19,-305 v2@-486.96,-305 ; v2(-486.82,-305.14) v2@-486.96,-305 ; JP2.6@-235,-380 -235,-321 -251,-305 -437.66,-305 ; -2871.66,-170.66 -2871.66,-36.66 -2868,-33 ; -2868,-33 -2395,-33 -2123.44,-304.56 ; -560.11,-874 -560,-873.89 -560,-791 -497.26,-728.26 U5.18@-497.26,-645 C25.1@-497.26,-538.56 -456.56,-538.56 -437.66,-519.66 -437.66,-305 ; v2@-486.96,-305 -437.66,-305
  Bottom Layer w10: TP4.1@-2288,-204 -2156,-204 v2@-2055.5,-304.5
  Bottom Layer w17: v2@-2039,-305 -1182.71,-305 ; v2@-1182.9,-1140.4 v2@-1182.9,-1016.6 ; v2(-1182.71,-368.28) -1182.71,-305 ; v2@-509.19,-305 -1182.71,-305
+5: C8.1 C9.1 C10.1 C14.1 C15.1 C16.1 D2.1 R6.2 TP2.1 U4.3 | length 931.8
  Top Layer w20: D2.1@-3797.62,-847.6 -3730.75,-780.73 C10.1@-3730.75,-704.46 ; R6.2@-3654.66,-704.46 C10.1@-3730.75,-704.46 ; v2(-3615,-410) -3615.55,-409.45 -3615.55,-333.07 C14.1@-3730.75,-333.07 C15.1@-3730.75,-408.76 C16.1@-3730.75,-482.67 C9.1@-3730.75,-556.63 C8.1@-3730.75,-630.54 C10.1@-3730.75,-704.46
  Bottom Layer w10: v2(-3615,-410) -3566,-410 TP2.1@-3515,-461
A2: JP1.7 U5.26 | length 771.6
  Top Layer w10: JP1.7@-907,-97 -907,-289 -769,-427 -769,-649 -813,-693 -813,-722 -798.22,-736.78 -749.98,-736.78 U5.26@-748.5,-738.26
A3: JP1.6 U5.25 | length 651
  Top Layer w10: JP1.6@-807,-97 -807,-319 -735,-391 -735,-703.2 -738.56,-706.76 U5.25@-748.5,-706.76
A4: JP1.5 U5.24 | length 556.6
  Top Layer w10: JP1.5@-707,-97 -707,-349 -686.24,-369.76 U5.24@-686.24,-645
A5: JP1.4 U5.23 | length 567.8
  Top Layer w10: U5.23@-654.74,-645 -654.74,-158.23 -607,-110.49 JP1.4@-607,-97
ADC6: JP1.3 U5.22 | length 596.1
  Top Layer w10: U5.22@-623.24,-645 -623.24,-213.24 JP1.3@-507,-97
ADC7: JP1.2 U5.19 | length 606.9
  Top Layer w10: U5.19@-528.76,-645 -528.76,-595.24 -539,-585 -539,-229 JP1.2@-407,-97
BOOT0: JP7.3 R23.2 U8.21 | length 889.2
  Top Layer w10: JP7.3@-2161,-1395 -1942,-1176 -1942,-832 -1958.33,-815.67 -2000.76,-815.67 U8.21@-2002.91,-813.52 -2063.48,-813.52 -2072,-805 R23.2@-2072,-710.66
CS_TFT: JP4.3 U5.1 | length 712.6
  Top Layer w10: v2(-687,-943) -687,-988.24 U5.1@-686.24,-989
  Bottom Layer w10: v2(-687,-943) -589,-845 -341,-845 -303,-883 JP4.3@-77,-883
D10: JP1.1 U5.14 | length 781.7
  Top Layer w10: v2(-452,-770) -451.88,-769.88 -403.62,-769.88 U5.14@-403.5,-769.76
  Bottom Layer w10: v2(-452,-770) -452,-504.96 -406,-458.96 -406,-196 JP1.1@-307,-97
D_N: R12.2 U7.6 | length 124.2
  Top Layer w10: R12.2@-2721.8,-1011.56 -2720,-1009.76 U7.6@-2720,-888.09
D_P: R11.2 U7.5 | length 131.2
  Top Layer w10: R11.2@-2788.73,-1011.56 -2788.73,-930.14 -2770,-911.42 U7.5@-2770,-888.09
DC_TFT: JP4.4 U5.2 | length 734
  Top Layer w10: v2(-656,-871) -655.37,-871.63 -655.37,-988.37 U5.2@-654.74,-989
  Bottom Layer w10: v2(-656,-871) -606,-821 -115,-821 JP4.4@-77,-783